# EAGLE board BLE Shield v1.0 (EAGLE 6.4)
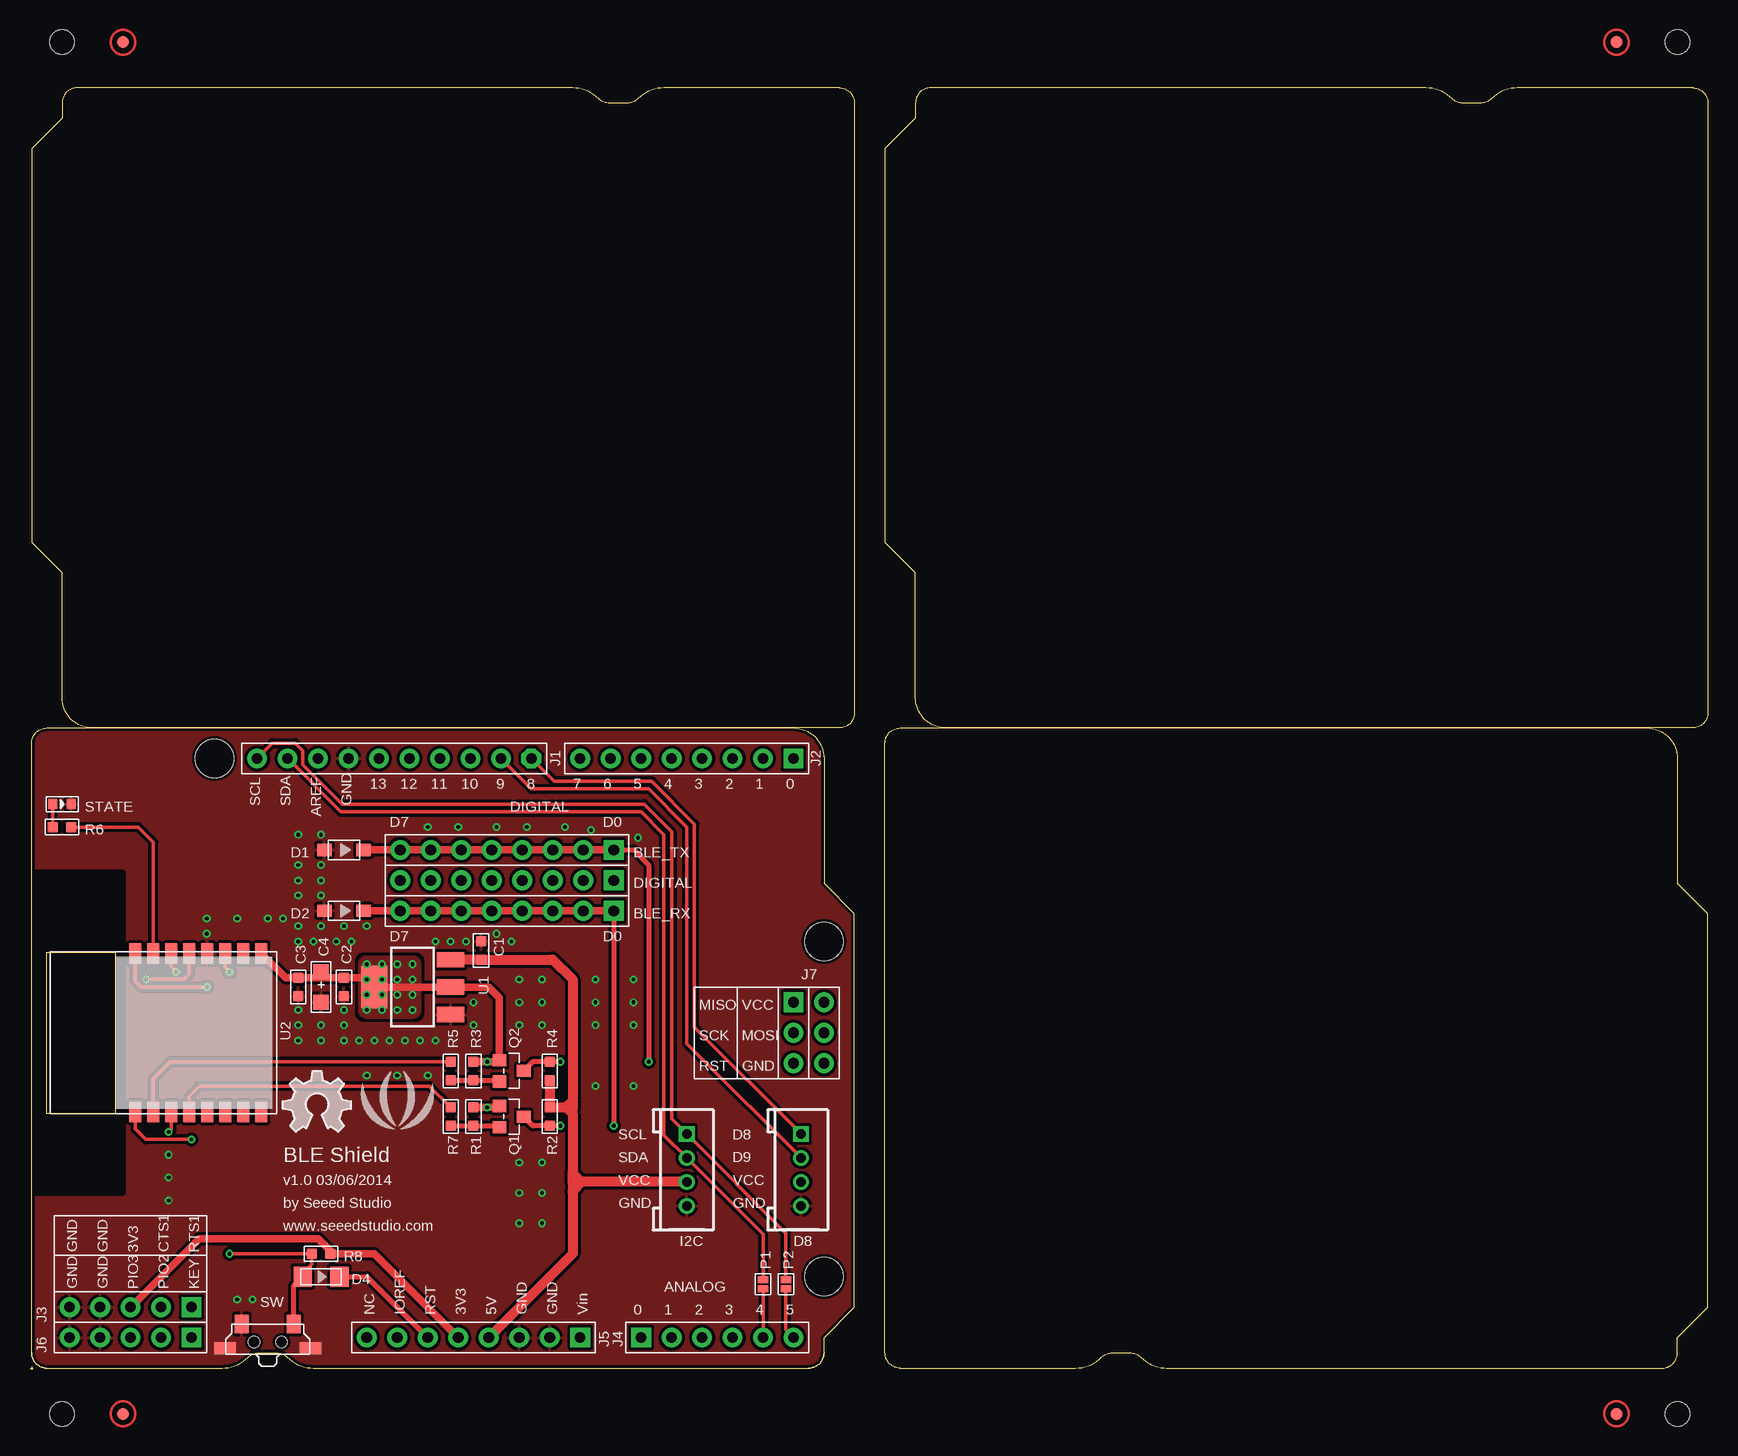
[diagram p0: board, top side]
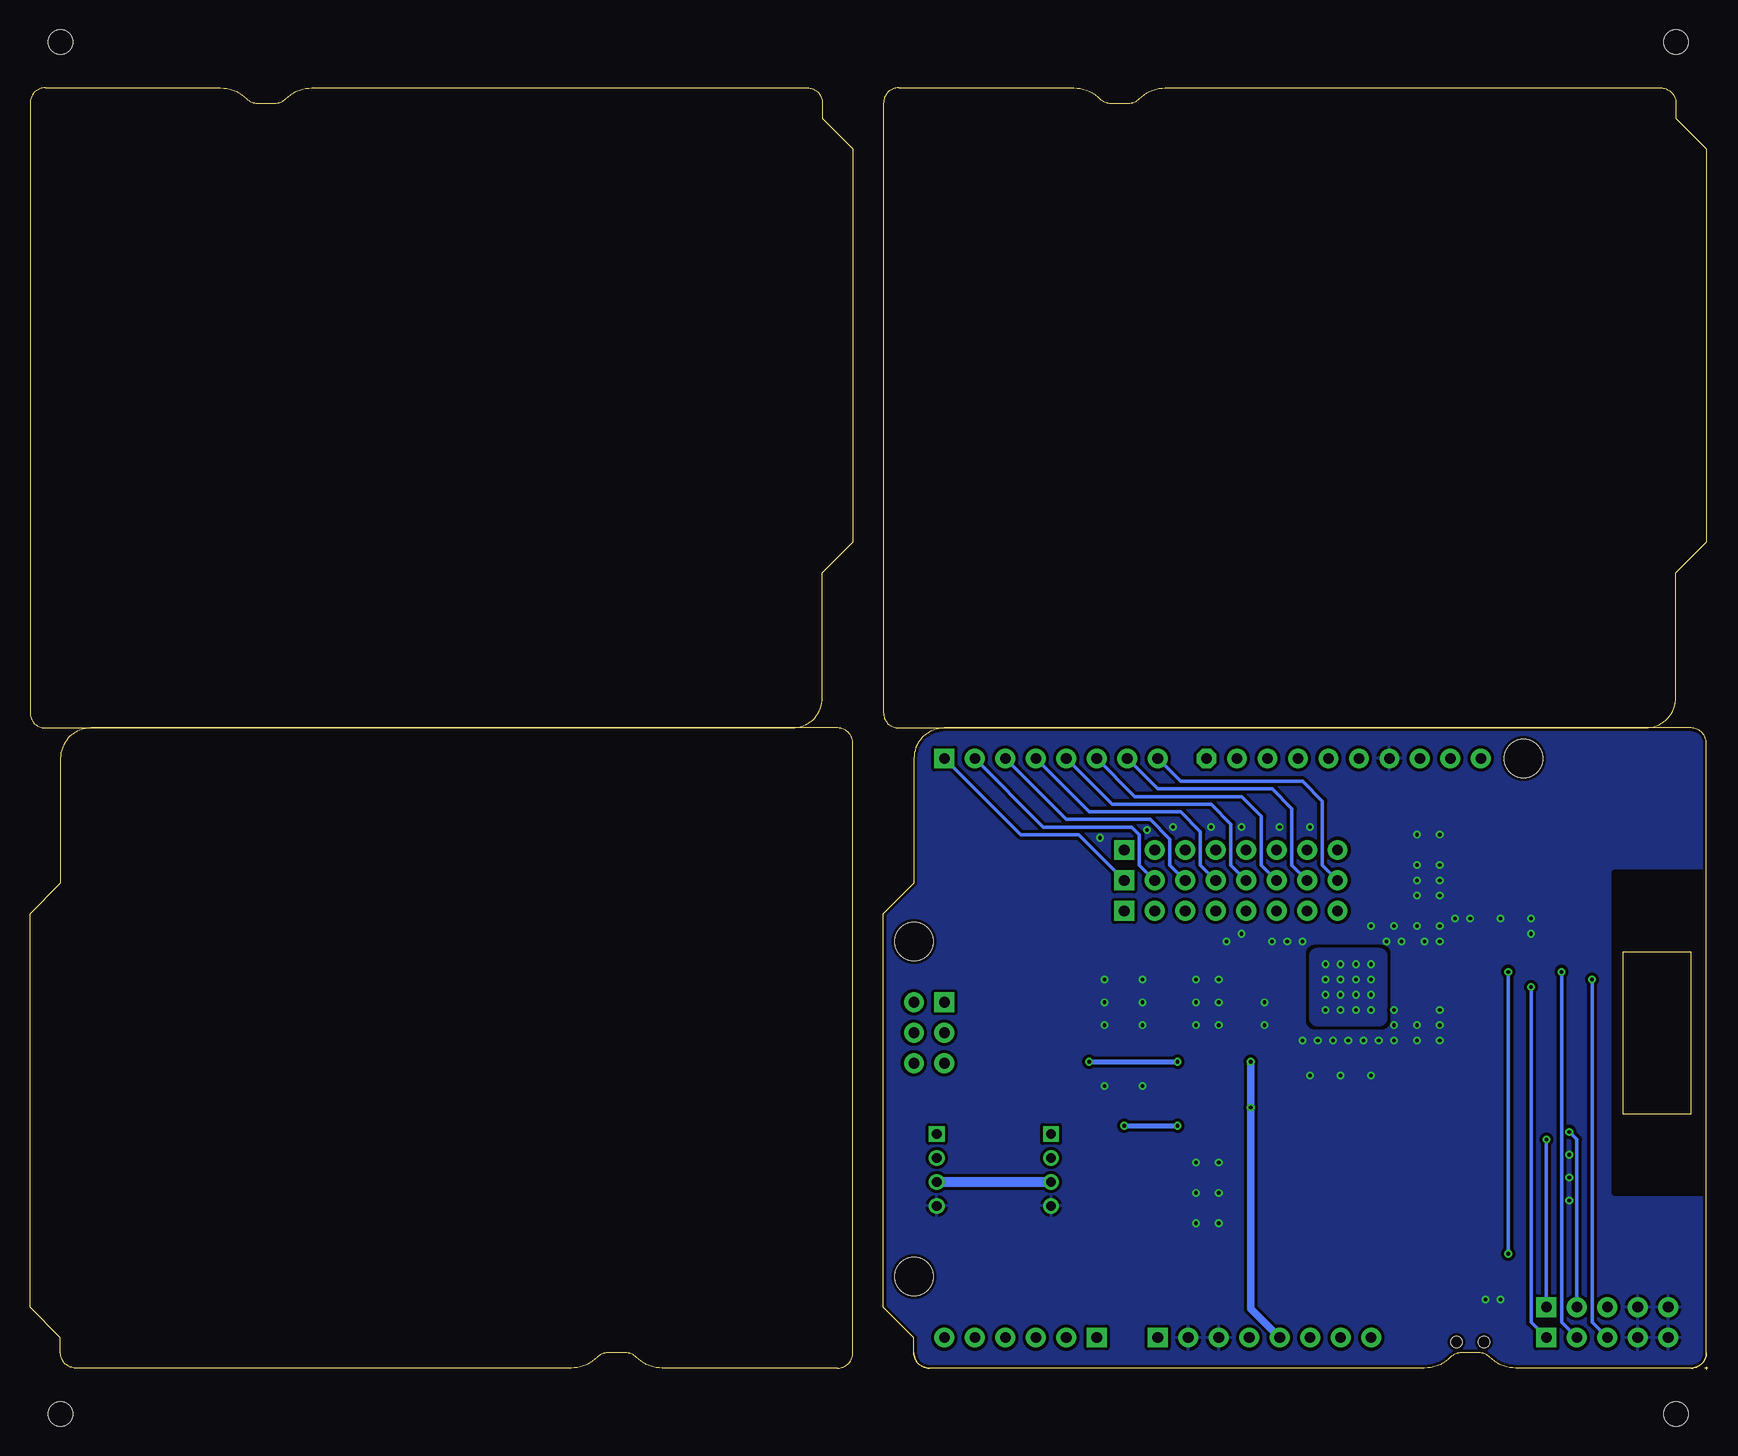
[diagram p1: board, bottom side, seen from below]

Size 139.83 x 106.81 mm. Coordinates in mm from the lower left corner, seen from the top.
Outline: 0.13,52.2 arc-90 1.4,53.47
Outline: 63.63,53.47 arc-90 66.17,50.93
Outline: 0.13,1.4 arc90 1.4,0.13
Outline: 66.17,1.4 arc-90 64.9,0.13
Outline: 64.9,0.13 23.77,0.13 23.62,0.13 arc-45 21.45,1.02 arc45 20.56,1.4 19.07,1.4 arc45 18.17,1.02 arc-45 16,0.13 1.4,0.13
Outline: 0,0.13 0.25,0.13
Outline: 0.13,0.25 0.13,0
Outline: 64.9,0.13 arc90 66.17,1.4
Outline: 66.17,1.4 66.17,2.67 68.71,5.21 68.71,37.97 66.17,40.51 66.17,50.93
Outline: 1.4,0.13 arc-90 0.13,1.4
Outline: 0.13,1.4 0.13,52.2
Outline: 1.4,53.47 63.63,53.47
Outline: 63.63,53.47 arc-90 66.17,50.93
Outline: 0.13,52.2 arc-90 1.4,53.47
Outline: 1.4,34.8 7.11,34.8 7.11,21.34 1.4,21.34 1.4,34.8
Outline: 72.52,0.13 87.12,0.13 arc45 89.29,1.02 arc-45 90.19,1.4 91.68,1.4 arc-45 92.57,1.02 arc45 94.74,0.13 136.02,0.13 arc90 137.29,1.4 137.29,2.67 139.83,5.21 139.83,37.97 137.29,40.51 137.29,50.93 arc90 134.75,53.47 72.52,53.47 arc90 71.25,52.2 71.25,1.4 arc90 72.52,0.13
Outline: 138.56,106.81 123.95,106.81 arc45 121.78,105.91 arc-45 120.89,105.54 119.4,105.54 arc-45 118.5,105.91 arc45 116.33,106.81 75.06,106.81 arc90 73.79,105.54 73.79,104.27 71.25,101.73 71.25,68.96 73.79,66.42 73.79,56.01 arc90 76.33,53.47 138.56,53.47 arc90 139.83,54.74 139.83,105.54 arc90 138.56,106.81
Outline: 67.44,106.81 52.83,106.81 arc45 50.66,105.91 arc-45 49.77,105.54 48.28,105.54 arc-45 47.38,105.91 arc45 45.21,106.81 3.94,106.81 arc90 2.67,105.54 2.67,104.27 0.13,101.73 0.13,68.96 2.67,66.42 2.67,56.01 arc90 5.21,53.47 67.44,53.47 arc90 68.71,54.74 68.71,105.54 arc90 67.44,106.81
Copper layers (1*16): Top 0.035mm / dielectric 1.5mm / Bottom 0.035mm
Design rules "SeeedStudio_2layer_DRU_no_angle_20140221 *": minimum track width 6mil, minimum drill 12mil, track to track 6mil, track to pad 6mil, pad to pad 6mil, via to via 6mil, smd to smd 0mil, copper to edge 10mil, drill to drill 10mil, minimum pad ring 10mil, minimum via ring 6mil, stop-mask expansion 2mil, vias tented up to drill 25mil, thermal gap 10mil
Net classes: 0 default: width 0.203 mm, drill 0.305 mm, clearance 0.152 mm; 3 usbvcc: width 0.203 mm, drill 0.305 mm, clearance 0.203 mm
Holes 3.2 mm at 15.37,50.93 66.17,7.75 66.17,35.69
Holes 2.03 mm at 2.67,110.62 137.29,110.62 137.29,-3.68 2.67,-3.68
tRestrict: 4 lines
bRestrict: 4 lines

## Footprints (pad centres in the part's own frame; a part is rotated, then mirrored left to right if it is on the bottom)
8P-2.54 = drill 0.889 pad 1.651 square: 1 0,8.89 | drill 0.889 pad 1.651: 2 0,6.35; 3 0,3.81; 4 0,1.27; 5 0,-1.27; 6 0,-3.81; 7 0,-6.35; 8 0,-8.89
C0603 = smd 0.889 x 0.889: 1 -0.762,0; 2 0.762,0
AVX-A = smd 1.27 x 1.27: + -1.27,0; - 1.27,0
SOD123-2.7X1.6 = smd 1.2 x 1.02: 1 -1.635,0; 2 1.635,0
LL-34 = smd 1.524 x 1.676: A -1.524,0; C 1.524,0
4P-2.0 = drill 0.8 pad 1.27 square: 1 -3,0 | drill 0.8 pad 1.27: 2 -1,0; 3 1,0; 4 3,0
10P-2.54 = drill 0.889 pad 1.651 octagon: 1 0,11.43 | drill 0.889 pad 1.651: 2 0,8.89; 3 0,6.35; 4 0,3.81; 5 0,1.27; 6 0,-1.27; 7 0,-3.81; 8 0,-6.35; 9 0,-8.89; 10 0,-11.43
8P-2.54-65/35MIL = drill 0.889 pad 1.651 square: 1 0,8.89 | drill 0.889 pad 1.651: 2 0,6.35; 3 0,3.81; 4 0,1.27; 5 0,-1.27; 6 0,-3.81; 7 0,-6.35; 8 0,-8.89
5P-2.54 = drill 0.889 pad 1.651 square: 1 0,5.08 | drill 0.889 pad 1.651: 2 0,2.54; 3 0,0; 4 0,-2.54; 5 0,-5.08
6P-2.54-65/35MIL = drill 0.889 pad 1.651 square: 1 0,6.35 | drill 0.889 pad 1.651: 2 0,3.81; 3 0,1.27; 4 0,-1.27; 5 0,-3.81; 6 0,-6.35
2X3P-2.54-65/35MIL = drill 0.889 pad 1.651 square: 1 -1.27,2.54 | drill 0.889 pad 1.651: 2 -1.27,0; 3 -1.27,-2.54; 4 1.27,-2.54; 5 1.27,0; 6 1.27,2.54
2P-SMD-1.78X1.27 = smd 0.889 x 0.61: 1 0,0.381; 2 0,-0.381
ROUND-MARK-1.0 = smd 1.016 x 1.016: P$1 0,0
SOT23 = smd 1.016 x 1.143: 1 -0.889,-1.016; 2 0.889,-1.016; 3 0,1.016
R0603 = smd 0.889 x 0.889: 1 -0.762,0; 2 0.762,0
LED-0603 = smd 0.762 x 0.889: + -0.762,0; - 0.762,0
4P-SMD-7X3.5X3.5H = smd 1.143 x 1.524: 1 -2.159,1.524; 2 2.159,1.524 | smd 1.778 x 1.016: S1 -3.556,-0.508; S2 3.556,-0.508 | hole 0.95: -1.15,0; 1.15,0
SOT223 = smd 1.27 x 2.286: 1 -2.286,-3.175; 2 0,-3.175; 3 2.286,-3.175 | smd 3.556 x 2.159: TER 0,3.175
16P-18.5X13.5X0.8 = smd 1.7 x 1: 1 -6.6,2.15; 2 -6.6,0.65; 3 -6.6,-0.85; 4 -6.6,-2.35; 5 -6.6,-3.85; 6 -6.6,-5.35; 7 -6.6,-6.85; 8 -6.6,-8.35; 9 6.6,-8.35; 10 6.6,-6.85; 11 6.6,-5.35; 12 6.6,-3.85; 13 6.6,-2.35; 14 6.6,-0.85; 15 6.6,0.65; 16 6.6,2.15

## Placement (x,y rotation side)
BLE_RX  2.54-8p-male  [8P-2.54]  39.75,38.23 270 top
BLE_TX  2.54-8p-male  [8P-2.54]  39.75,43.31 270 top
C1  1uF  [C0603]  37.59,34.93 270 top
C2  1uF  [C0603]  26.16,31.88 90 top
C3  100nF  [C0603]  22.35,31.88 270 top
C4  47uF/10v  [AVX-A]  24.26,31.88 270 top
D1  6.2V/250mW  [SOD123-2.7X1.6]  26.16,43.31 0 top
D2  6.2V/250mW  [SOD123-2.7X1.6]  26.16,38.23 0 top
D4  1N4148  [LL-34]  24.26,7.75 0 top
D8  DIP Grove  [4P-2.0]  64.26,16.64 270 top
DIGITAL  2.54-8p-male  [8P-2.54]  39.75,40.77 270 top
I2C  DIP Grove  [4P-2.0]  54.74,16.64 270 top
J1  DIP Long Blue Female Header  [10P-2.54]  30.35,50.93 270 top
J2  DIP Long Blue Female Header  [8P-2.54-65/35MIL]  54.74,50.93 270 top
J3  DNP  [5P-2.54]  8.38,5.21 270 top
J4  DIP Long Blue Female Header  [6P-2.54-65/35MIL]  57.28,2.67 90 top
J5  DIP Long Blue Female Header  [8P-2.54-65/35MIL]  36.96,2.67 270 top
J6  DNP  [5P-2.54]  8.38,2.67 270 top
J7  DIP Long Blue Female Header  [2X3P-2.54-65/35MIL]  64.9,28.07 0 top
P1  DNP  [2P-SMD-1.78X1.27]  61.09,7.11 180 top
P2  DNP  [2P-SMD-1.78X1.27]  62.99,7.11 180 top
P3  [ROUND-MARK-1.0]  7.75,-3.68 0 top  (outside the outline)
P4  [ROUND-MARK-1.0]  132.21,-3.68 0 top  (outside the outline)
P5  [ROUND-MARK-1.0]  7.75,110.62 0 top  (outside the outline)
P6  [ROUND-MARK-1.0]  132.21,110.62 0 top  (outside the outline)
Q1  2n7002  [SOT23]  40.13,21.08 270 top
Q2  2n7002  [SOT23]  40.13,24.89 270 top
R1  10k  [R0603]  36.96,21.08 270 top
R2  10k  [R0603]  43.31,21.08 90 top
R3  10k  [R0603]  36.96,24.89 90 top
R4  10k  [R0603]  43.31,24.89 270 top
R5  1k  [R0603]  35.05,24.89 90 top
R6  1k  [R0603]  2.67,45.21 180 top
R7  1k  [R0603]  35.05,21.08 90 top
R8  10k  [R0603]  24.26,9.65 180 top
STATE  Green  [LED-0603]  2.67,47.12 0 top
SW  TS-1188E  [4P-SMD-7X3.5X3.5H]  19.81,2.29 0 top
U1  CJ1117-3.3-1310190P1  [SOT223]  31.88,31.88 90 top
U2  HM-11  [16P-18.5X13.5X0.8]  10.92,28.07 90 top
U$23  [OSHW_FILLX200_NOTEXT]  21.08,19.81 0 top
U$24  [LOGO_SILK]  30.61,21.72 0 top

## Library data of the parts
BLE_RX BLE_TX D8 DIGITAL I2C J3 J6 = Connector
C1-C4 D1 D2 D4 Q1 Q2 R1-R8 STATE SW = Discrete
J1 J2 J4 J5 J7 = Connector 
P1-P6 = Discrete; PARTNO: DNP
U1 = OPL
U2 = template
U$23 U$24 = logo

## Nets
3V3: C2.2 C3.1 C4.+ J3.3 J5.5 Q1.1 Q2.1 R1.1 R3.2 R8.1 U1.2 U1.TER U2.9
5V: C1.2 D8.3 I2C.3 J5.4 R2.2 R4.2 U1.3
A0: J4.1
A1: J4.2
A2: J4.3
A3: J4.4
A4: J4.5 P1.1
A5: J4.6 P2.1
AREF: J1.8
BT_RX: BLE_RX.1 BLE_RX.2 BLE_RX.3 BLE_RX.4 BLE_RX.5 BLE_RX.6 BLE_RX.7 BLE_RX.8 D2.2 Q1.3 R2.1
BT_TX: BLE_TX.1 BLE_TX.2 BLE_TX.3 BLE_TX.4 BLE_TX.5 BLE_TX.6 BLE_TX.7 BLE_TX.8 D1.2 Q2.3 R4.1
CTS1: J3.2 U2.3
D0: DIGITAL.1 J2.1
D1: DIGITAL.2 J2.2
D2: DIGITAL.3 J2.3
D3: DIGITAL.4 J2.4
D4: DIGITAL.5 J2.5
D5: DIGITAL.6 J2.6
D6: DIGITAL.7 J2.7
D7: DIGITAL.8 J2.8
D8: D8.1 J1.1
D9: D8.2 J1.2
D10: J1.3
D11: J1.4
D12: J1.5
D13: J1.6
GND: C1.1 C2.1 C3.2 C4.- D1.1 D2.1 D8.4 I2C.4 J1.7 J3.4 J3.5 J5.2 J5.3 J6.4 J6.5 STATE.- SW.1 SW.S1 SW.S2 U1.1 U2.12
IOREF: J5.7
KEY: J6.1 U2.16
LED: R6.1 U2.15
N$1: J5.1
N$2: R6.2 STATE.+
N$3: R5.2 U2.2
N$6: R7.2 U2.4
NC: J5.8
NC5: U2.5
NC6: U2.6
NC7: U2.7
NC8: U2.8
NC10: U2.10
PIO2: J6.2 U2.14
PIO3: J6.3 U2.13
RESET: D4.C J5.6
RST: D4.A R8.2 SW.2 U2.11
RTS1: J3.1 U2.1
RXD1: Q1.2 R1.2 R7.1
SCL: I2C.1 J1.10 P2.2
SDA: I2C.2 J1.9 P1.2
TXD1: Q2.2 R3.1 R5.1

## Tracks (layer width: path | path; a pad name or v marks a point on that pad's centre or on a via)
3V3  (via drill 0.3 pad 0.64)
  Top 0.61: R3.2 v38.1,25.65 38.99,25.65 Q2.1 39.12,30.99 38.23,31.88 U1.2 U1.TER 28.7,32.51 28.57,32.64 C2.2 24.26,32.64 | Q1.1 38.99,21.84 v38.1,21.84 R1.1 | 19.39,34.54 U2.9 21.3,32.64 C3.1 24.26,32.64 | J3.3 14.1,10.92 24,10.92 25.02,9.91 R8.1 28.7,9.65 J5.5 | C4.+ 24.26,32.64
  Bottom 0.61: v38.1,25.65 38.1,22.48 v38.1,21.84 38.1,5.08 J5.5
  other vias: 28.07,29.97 28.07,31.24 28.07,32.51 28.07,33.78 29.34,33.78 29.34,32.51 29.34,31.24 29.34,29.97 30.61,29.97 31.88,29.97 31.88,31.24 31.88,32.51 31.88,33.78 30.61,33.78 30.61,32.51 30.61,31.24
  pour Top (isolate 0.254, no thermals): 31.88,29.34 28.07,29.34 arc-90 27.43,29.97 27.43,33.78 arc-90 28.07,34.42 31.88,34.42 arc-90 32.51,33.78 32.51,29.97 arc-90
  pour Bottom (isolate 0.254, no thermals): 33.15,34.42 33.15,29.34 arc-90 32.51,28.7 27.43,28.7 arc-90 26.8,29.34 26.8,34.42 arc-90 27.43,35.05 32.51,35.05 arc-90
5V
  Top 0.813: R4.2 R2.2 44.7,21.84 | U1.3 C1.2 43.56,34.16 45.21,32.51 45.21,22.35 | 45.21,21.72 45.21,22.22 45.21,22.35 | 45.21,21.34 45.21,16.38 | 45.21,15.62 45.21,14.86 | 45.21,14.86 45.21,9.65 J5.4 | 44.7,21.84 45.09,21.84 45.21,21.72 | I2C.3 45.99,15.64 | 45.96,15.64 45.23,15.64 45.21,15.62 | 45.99,15.64 45.96,15.64 | 45.96,15.64 45.21,16.38 | 45.99,15.64 45.21,14.86 | 45.21,15.62 45.21,16.38 | 44.7,21.84 45.21,22.35 | 44.7,21.84 45.21,21.34 | 45.21,21.34 45.21,21.72
  Bottom 0.813: D8.3 I2C.3
A4
  Top 0.305: P1.1 J4.5
A5
  Top 0.305: P2.1 62.99,3.3 J4.6
BT_RX  (via drill 0.3 pad 0.64)
  Top 0.406: Q1.3 41.91,20.32 R2.1 v44.2,20.32 | BLE_RX.1 v48.64,20.32
  Top 0.61: D2.2 BLE_RX.8 BLE_RX.7 BLE_RX.6 BLE_RX.5 BLE_RX.4 BLE_RX.3 BLE_RX.2 BLE_RX.1
  Bottom 0.406: v48.64,20.32 v44.2,20.32
BT_TX  (via drill 0.3 pad 0.64)
  Top 0.406: Q2.3 41.91,25.65 R4.1 v44.2,25.65 | BLE_TX.1 50.29,43.31 51.56,42.04 v51.56,25.65
  Top 0.61: D1.2 BLE_TX.8 BLE_TX.7 BLE_TX.6 BLE_TX.5 BLE_TX.4 BLE_TX.3 BLE_TX.2 BLE_TX.1
  Bottom 0.406: v51.56,25.65 v44.2,25.65
CTS1  (via drill 0.3 pad 0.64)
  Top 0.305: U2.3 11.77,20.03 v11.56,19.81
  Bottom 0.305: J3.2 10.92,19.18 11.18,19.43 v11.56,19.81
D0
  Bottom 0.305: J2.1 57.28,44.58 52.45,44.58 DIGITAL.1
D1
  Bottom 0.305: DIGITAL.2 47.37,42.04 47.37,44.58 48.01,45.21 55.37,45.21 J2.2
D2
  Bottom 0.305: DIGITAL.3 44.83,42.04 44.83,44.2 46.48,45.85 53.47,45.85 J2.3
D3
  Bottom 0.305: DIGITAL.4 42.29,42.04 42.29,44.83 43.94,46.48 51.56,46.48 J2.4
D4
  Bottom 0.305: DIGITAL.5 39.75,42.04 39.75,45.47 41.4,47.12 49.66,47.12 J2.5
D5
  Bottom 0.305: DIGITAL.6 37.21,42.04 37.21,46.1 38.86,47.75 47.75,47.75 J2.6
D6
  Bottom 0.305: DIGITAL.7 34.67,42.04 34.67,46.74 36.32,48.39 45.85,48.39 J2.7
D7
  Bottom 0.305: DIGITAL.8 32.13,42.04 32.13,47.37 33.78,49.02 43.94,49.02 J2.8
D8
  Top 0.305: J1.1 43.69,49.02 51.82,49.02 55.37,45.47 55.37,28.53 D8.1
D9
  Top 0.305: J1.2 41.78,48.39 51.56,48.39 54.74,45.21 54.74,27.16 55.49,26.41 D8.2
GND  (via drill 0.3 pad 0.64)
  other vias: 14.73,36.32 14.73,37.59 11.56,17.91 11.56,14.1 11.56,16 33.15,24.51 30.61,24.51 28.07,24.51 33.15,45.21 35.69,45.21 38.86,45.21 41.4,45.21 44.58,45.21 50.67,44.32 46.74,44.96 22.35,29.97 22.35,28.7 24.26,28.7 26.16,29.97 26.16,28.7 36.96,30.61 36.96,28.7 36.32,35.69 38.86,36.32 42.67,30.61 42.67,28.7 18.54,5.84 17.27,5.84 24.26,42.04 24.26,40.77 24.26,39.5 24.26,36.96 24.26,44.58 40.13,35.69 47.12,30.61 47.12,28.7 50.29,30.61 50.29,28.7 22.35,27.43 24.26,27.43 26.16,27.43 35.05,35.69 33.78,35.69 22.35,35.69 25.53,35.69 23.62,35.69 26.8,35.69 27.43,27.43 28.7,27.43 29.97,27.43 31.24,27.43 32.51,27.43 33.78,27.43 22.35,36.96 22.35,39.5 22.35,40.77 22.35,42.04 22.35,44.58 26.16,36.96 28.07,36.96 17.27,37.59 19.81,37.59 21.08,37.59 42.67,32.51 47.12,32.51 50.29,32.51 42.67,14.73 42.67,17.27 42.67,12.19 40.77,32.51 40.77,30.61 40.77,28.7 47.12,23.62 50.29,23.62 40.77,17.27 40.77,14.73 40.77,12.19
  pour Bottom (isolate 0.254, rank 6): 0.13,53.47 68.71,53.47 68.71,0.13 0.13,0.13
  pour Top (isolate 0.254, rank 6): 0.13,53.47 68.71,53.47 68.71,0.13 0.13,0.13
KEY  (via drill 0.3 pad 0.64)
  Top 0.305: U2.16 8.77,32.38 9.27,31.88 v14.73,31.88
  Bottom 0.305: J6.1 14.73,3.94 v14.73,31.88
LED
  Top 0.305: U2.15 10.29,34.68 10.29,43.94 9.02,45.21 R6.1
N$2
  Top 0.305: R6.2 STATE.+
N$3
  Top 0.305: U2.2 10.29,21.48 10.29,24.26 11.68,25.65 R5.2
N$6
  Top 0.305: R7.2 33.27,23.62 14.1,23.62 13.27,22.8 U2.4
PIO2  (via drill 0.3 pad 0.64)
  Top 0.305: U2.14 11.77,33.57 v12.19,33.15
  Bottom 0.305: J6.2 12.19,3.94 v12.19,33.15
PIO3  (via drill 0.3 pad 0.64)
  Top 0.305: U2.13 13.27,32.96 12.83,32.51 v9.65,32.51
  Bottom 0.305: J6.3 9.65,3.94 v9.65,32.51
RESET
  Top 0.406: D4.C 28.07,7.75 J5.6
RST  (via drill 0.3 pad 0.64)
  Top 0.305: U2.11 16.27,33.51 v16.64,33.15 | v16.64,9.65 R8.2 23.49,8.76 22.99,8.26 22.99,8 D4.A
  Top 0.406: SW.2 21.97,6.98 D4.A
  Bottom 0.305: v16.64,33.15 v16.64,9.65
RTS1  (via drill 0.3 pad 0.64)
  Top 0.305: v13.46,19.18 9.65,19.18 8.77,20.06 U2.1
  Bottom 0.305: J3.1 v13.46,19.18
RXD1
  Top 0.406: R7.1 R1.2 38.99,20.32 Q1.2
SCL
  Top 0.305: J1.10 20.19,52.2 22.1,52.2 22.73,51.56 22.73,50.42 26.04,47.12 51.18,47.12 53.47,44.83 53.47,20.91 I2C.1 62.99,11.38 P2.2
SDA
  Top 0.305: P1.2 61.09,11.29 I2C.2 | J1.9 25.91,46.48 50.93,46.48 52.83,44.58 52.83,19.54 I2C.2 | I2C.2 54.74,17.65
TXD1
  Top 0.406: R5.1 R3.1 38.99,24.13 Q2.2

## Text on the board
tPlace: 13 | 12 | 11 | 10 | 9 | 8 | 7 | 6 | 5 | 4 | 3 | 2 | 1 | 0 | SCL | SDA | GND | AREF | DIGITAL | D7 | D0 | D7 | D0 | MISO | VCC | SCK | MOSI | RST | GND | SCL | D8 | BLE Shield | SDA | D9 | v1.0 03/06/2014 | VCC | VCC | by Seeed Studio | GND | GND | www.seeedstudio.com | GND | GND | 3V3 | CTS1 | RTS1 | GND | GND | PIO3 | PIO2 | KEY | ANALOG | NC | IOREF | RST | 3V3 | 5V | GND | GND | Vin | 0 | 1 | 2 | 3 | 4 | 5